# Altium PCB 核心板PCB.PcbDoc
Units mil, origin at the board's own origin, x right, y up, seen from the top; angles counter-clockwise.
Board outline 1430.31 x 1010.17 mil, 2 copper layers (Top Layer, Bottom Layer); 26 components, 57 nets, 168 pads, 30 vias.
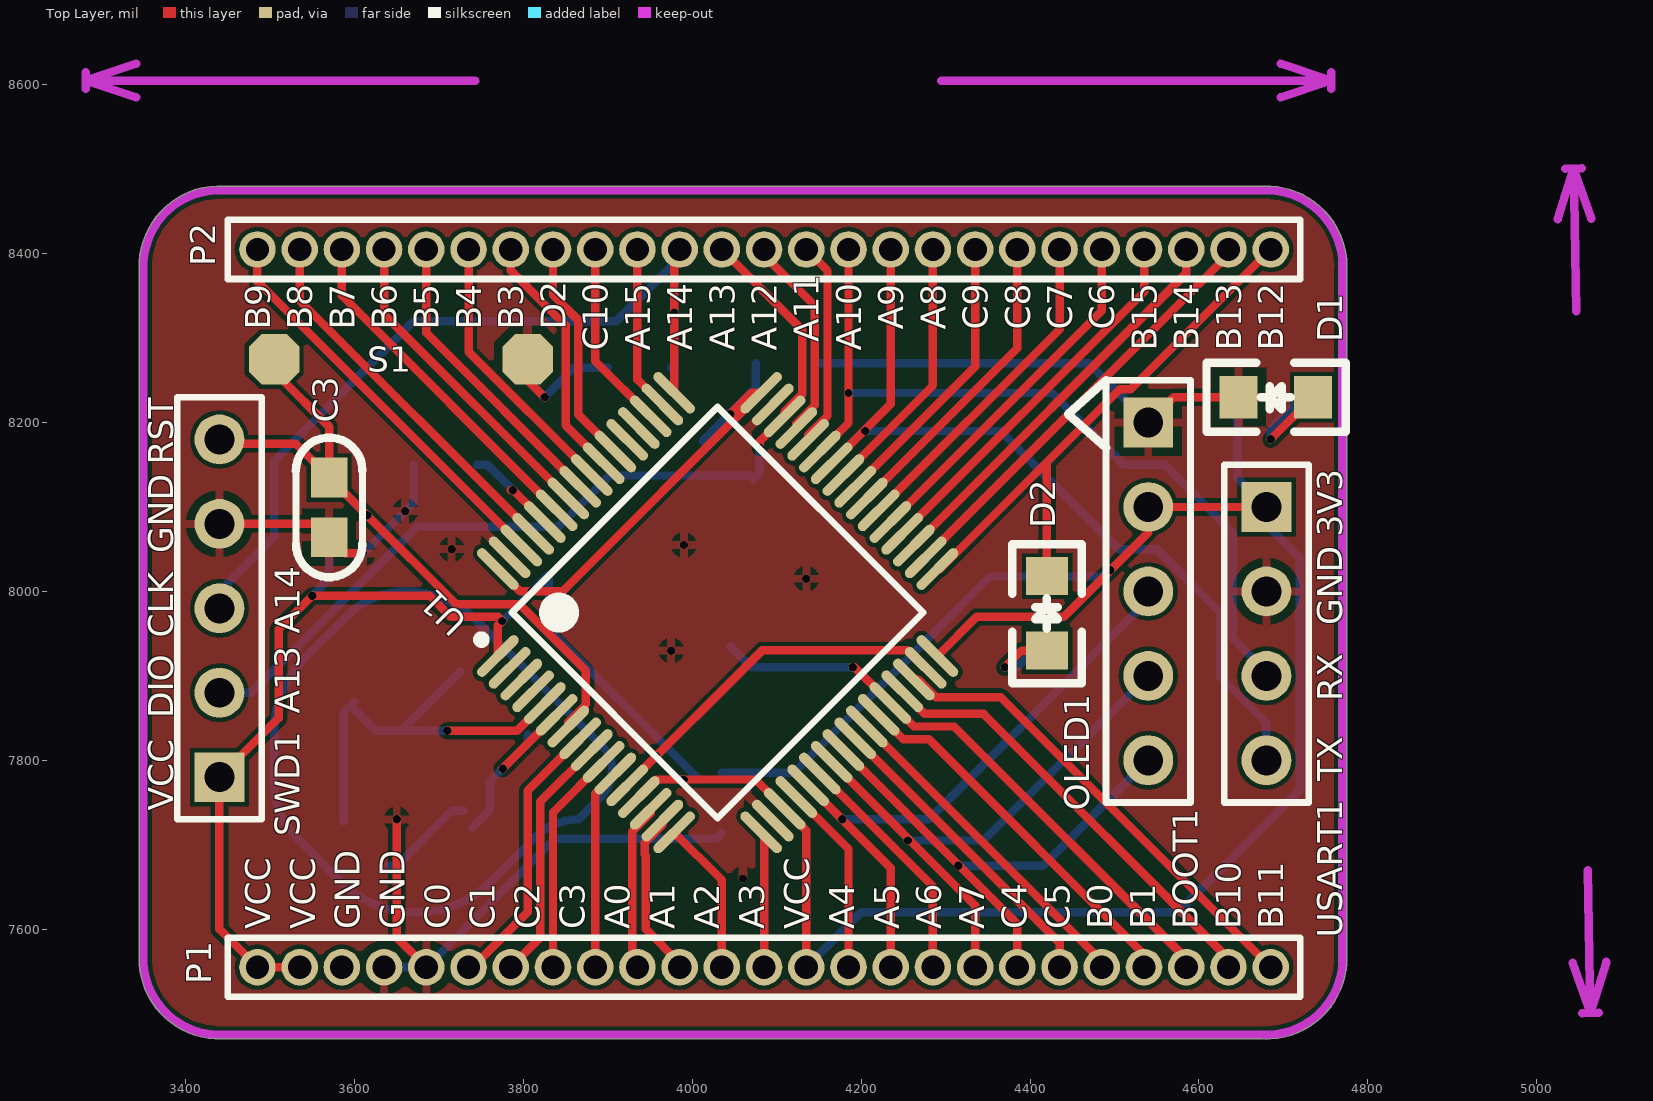
[diagram p0: Top Layer view]
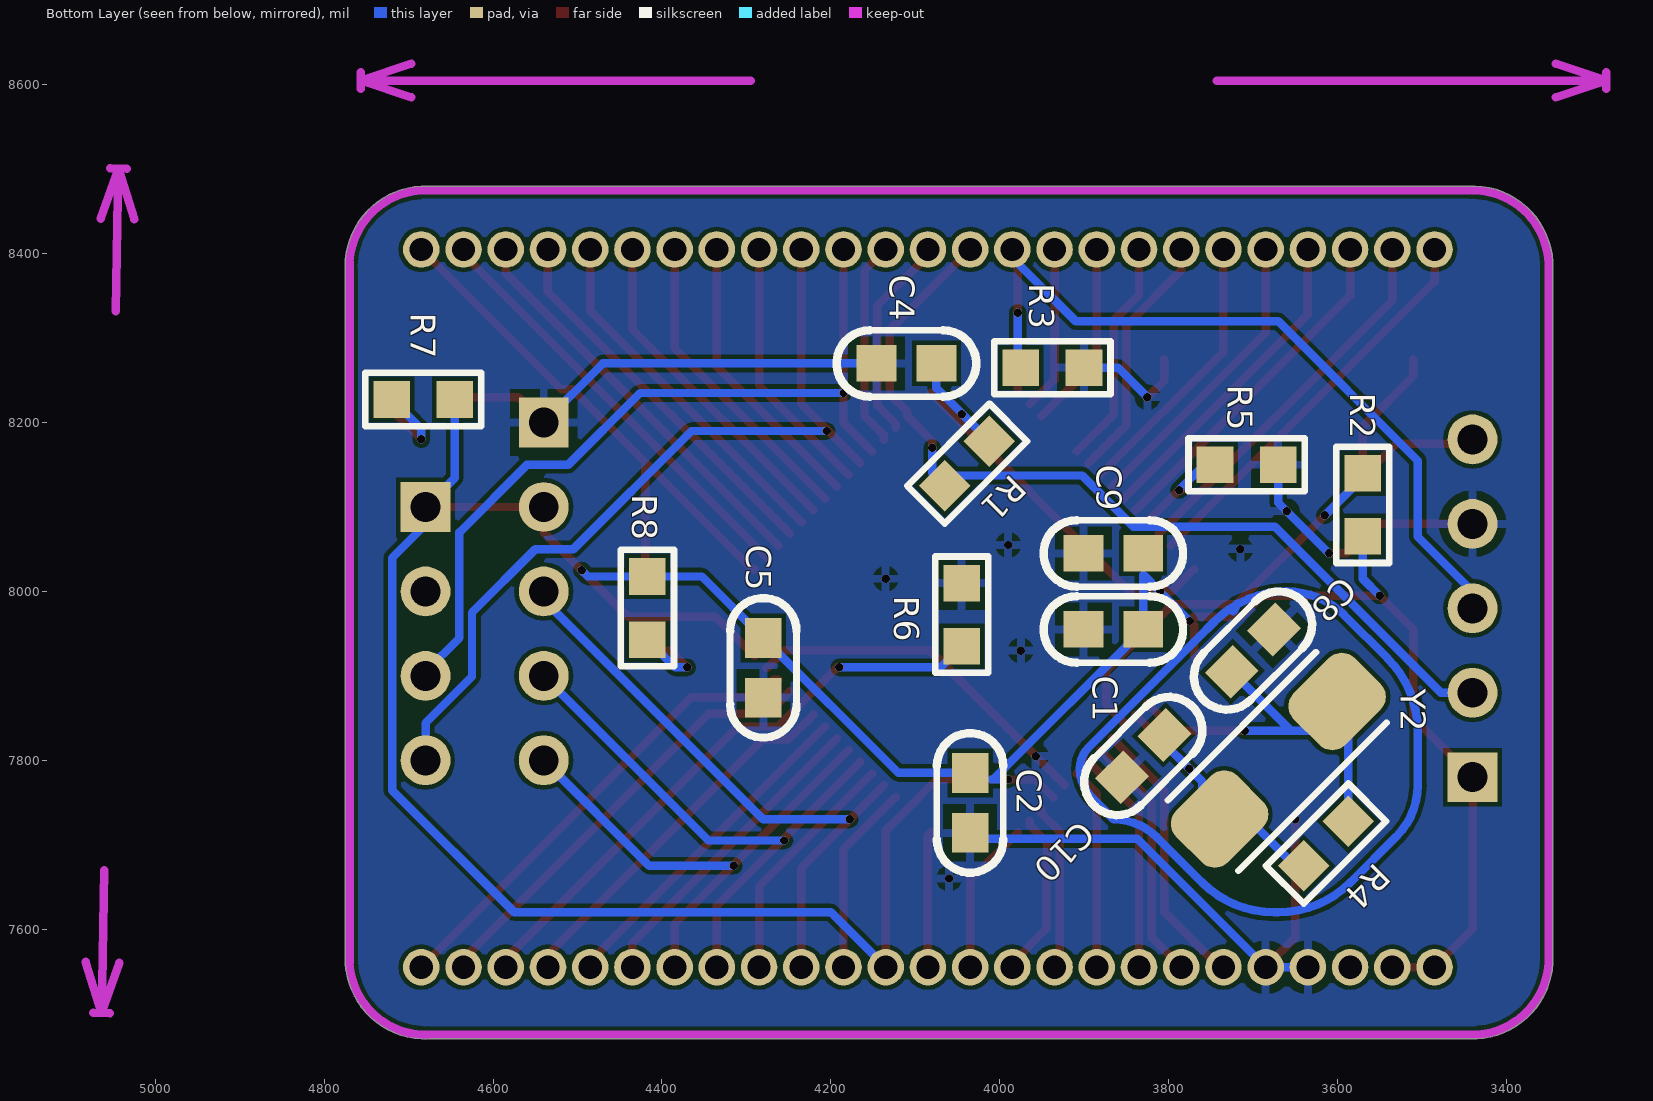
[diagram p1: Bottom Layer view, seen from below]

## Layer stack, top to bottom
Top Layer: signal copper 1.4
Dielectric: dielectric 12.6, FR-4, Dk 4.8
Bottom Layer: signal copper 1.4

## Board outline
3434.72,7469.99 cw(c3440,7565) 3344.99,7559.72 cw(c3440,7565) 3344.99,7570.14 3344.99,8390 cw(c3350,8390) 3344.99,8390.28 cw(c3440,8385) 3445.14,8480.01 4685,8480.01 cw(c4685,8475) 4685.28,8480.01 cw(c4680,8385) 4775.15,8385 cw(c4680,8385) 4775.02,8379.86 4775.02,7560 cw(c4770,7560) 4775.01,7559.72 cw(c4680,7565) 4685.28,7469.99 cw(c4680,7565) 4674.86,7469.98 3435,7469.98 cw(c3435,7475)

## Design rules (kind name [scope] priority, off if disabled: settings)
Clearance [All] p1: gap=5
PolygonConnect [All] p1: connectstyle=Relief reliefconductorwidth=10 reliefentries=4 polygonreliefangle="90 Angle" airgapwidth=10
RoutingVias [All] p1: holewidth=28 width=50 viastyle="Through Hole" minholewidth=28 minwidth=50 maxholewidth=28 maxwidth=50
SolderMaskExpansion [All] p1: expansion=4
Width [All] p1: maxlimit=10 minlimit=10 preferedwidth=10
28 further rules are at their usual default settings.

## Components (designator, comment, footprint, x,y, rotation, side; value= is the part's Value field where it differs from the comment)
C1 "Cap" CAP-MLCC-0603#1 3830,7955 r0 bottom
C2 "Cap" CAP-MLCC-0603#1 4035,7785 r270 bottom
C3 "Cap" CAP-MLCC-0603#2 3570,8135 r90 top
C4 "Cap" CAP-MLCC-0603#1 4075,8270 r0 bottom
C5 "Cap" CAP-MLCC-0603#1 4280,7945 r270 bottom
C8 "Cap" CAP-MLCC-0603#1 3675,7955 r315 bottom
C9 "Cap" CAP-MLCC-0603#1 3830,8045 r0 bottom
C10 "Cap" CAP-MLCC-0603#1 3855,7780 r135 bottom
D1 "lED" 0805D 4735,8230 r180 top
D2 "lED" 0805D 4420,7930 r90 top
OLED1 "Header 5" HDR1X5 4540,8200 r270 top
P1 "Comment" HDR1X25_1.27 3485,7605 r0 top
P2 "Comment" HDR1X25_1.27 3485,8455 r0 top
R1 "Res1" RES-0603#1 4065,8125 r135 bottom
R2 "Res1" RES-0603#2 3570,8140 r90 bottom
R3 "Res1" RES-0603#1 3975,8265 r180 bottom
R4 "Res1" RES-0603#1 3640,7675 r135 bottom
R5 "Res1" RES-0603#1 3745,8150 r180 bottom
R6 "Res1" RES-0603#1 4045,7935 r90 bottom
R7 "Res1" RES-0603#1 4720.11,8227.31 r180 bottom
R8 "Res1" RES-0603#1 4417.31,7942.89 r90 bottom
S1 "SW-PB" "key - duplicate" 3625,8275 r0 top
SWD1 "Header 5" HDR1X5 3440,7780 r90 top
U1 "stm32F103RCT6" STM32F103RCT6 4030,7975 r45 top
USART1 "Header 4" HDR1X4 4680,8100 r270 top
Y2 "8M" Osc-6032 3670,7800 r135 bottom

## Footprints (in the part's own frame and the unit in brackets; to place one, negate y for a bottom-side part, rotate by r counter-clockwise, add the part's x,y. Pads: shape width x height; smd on the part's side, far side on the other; paste and mask are expansions set on the pad)
0805D [mil]
  rect 45x50 smd: A(0,0) K(88,0)
  silkscreen extent -39,-41 126,41
CAP-MLCC-0603#1 [mm]
  rect 1.2x1.1 smd: 1(0,0) 2(1.8,0)
  silkscreen extent -1.2,-1 3,1, body extent 0.02,-0.48 1.77,0.47, height 0.85
CAP-MLCC-0603#2 [mm]
  rect 1.2x1.1 smd: 1(0,0) 2(-1.8,0)
  silkscreen extent -3,-1 1.2,1, body extent -1.77,-0.47 -0.02,0.48, height 0.85
HDR1X4 [mm] "Connector; Header; 4 Position"
  rect 1.5x1.5 hole 0.9: 1(0,0)
  round 1.5 hole 0.9: 2(2.54,0) 3(5.08,0) 4(7.62,0)
  silkscreen extent -1.27,-1.27 8.89,1.27
HDR1X5 [mm] "Connector; Header; 5 Position"
  rect 1.5x1.5 hole 0.9: 1(0,0)
  round 1.5 hole 0.9: 2(2.54,0) 3(5.08,0) 4(7.62,0) 5(10.16,0)
  silkscreen extent -1.27,-1.27 11.43,1.27
HDR1X25_1.27 [mm]
  round 1.1 hole 0.7: 1(0,-1.27) 2(1.27,-1.27) 3(2.54,-1.27) 4(3.81,-1.27) 5(5.08,-1.27) 6(6.35,-1.27) 7(7.62,-1.27) 8(8.89,-1.27) 9(10.16,-1.27) 10(11.43,-1.27) 11(12.7,-1.27) 12(13.97,-1.27) 13(15.24,-1.27) 14(16.51,-1.27) 15(17.78,-1.27) 16(19.05,-1.27) 17(20.32,-1.27) 18(21.59,-1.27) 19(22.86,-1.27) 20(24.13,-1.27) 21(25.4,-1.27) 22(26.67,-1.27) 23(27.94,-1.27) 24(29.21,-1.27) 25(30.48,-1.27)
  silkscreen extent -0.89,-2.16 31.37,-0.38
"key - duplicate" [mil]
  oct 60x60 smd: 1(-120,0) 2(180,0)
Osc-6032 [mm]
  rrect50% 2.6x2.2 smd: 1(-2.5,0) 2(2.5,0)
  silkscreen extent -3.2,-1.5 3.1,1.5
RES-0603#1 [mm]
  rect 1.1x1.1 smd: 1(0,0) 2(1.9,0)
  silkscreen extent -0.8,-0.8 2.7,0.8, body extent 0.1,-0.48 1.8,0.47, height 0.6
RES-0603#2 [mm]
  rect 1.1x1.1 smd: 1(0,0) 2(-1.9,0)
  silkscreen extent -2.7,-0.8 0.8,0.8, body extent -1.8,-0.47 -0.1,0.48, height 0.6
STM32F103RCT6 [mm]
  oval 1.65x0.3 smd: 1(-5.6,3.75) 2(-5.6,3.25) 3(-5.6,2.75) 4(-5.6,2.25) 5(-5.6,1.75) 6(-5.6,1.25) 7(-5.6,0.75) 8(-5.6,0.25) 9(-5.6,-0.25) 10(-5.6,-0.75) 11(-5.6,-1.25) 12(-5.6,-1.75) 13(-5.6,-2.25) 14(-5.6,-2.75) 15(-5.6,-3.25) 16(-5.6,-3.75) 33(5.6,-3.75) 34(5.6,-3.25) 35(5.6,-2.75) 36(5.6,-2.25) 37(5.6,-1.75) 38(5.6,-1.25) 39(5.6,-0.75) 40(5.6,-0.25) 41(5.6,0.25) 42(5.6,0.75) 43(5.6,1.25) 44(5.6,1.75) 45(5.6,2.25) 46(5.6,2.75) 47(5.6,3.25) 48(5.6,3.75)
  oval 0.3x1.65 smd: 17(-3.75,-5.6) 18(-3.25,-5.6) 19(-2.75,-5.6) 20(-2.25,-5.6) 21(-1.75,-5.6) 22(-1.25,-5.6) 23(-0.75,-5.6) 24(-0.25,-5.6) 25(0.25,-5.6) 26(0.75,-5.6) 27(1.25,-5.6) 28(1.75,-5.6) 29(2.25,-5.6) 30(2.75,-5.6) 31(3.25,-5.6) 32(3.75,-5.6) 49(3.75,5.6) 50(3.25,5.6) 51(2.75,5.6) 52(2.25,5.6) 53(1.75,5.6) 54(1.25,5.6) 55(0.75,5.6) 56(0.25,5.6) 57(-0.25,5.6) 58(-0.75,5.6) 59(-1.25,5.6) 60(-1.75,5.6) 61(-2.25,5.6) 62(-2.75,5.6) 63(-3.25,5.6) 64(-3.75,5.6)
  silkscreen extent -5.72,-4.37 4.37,4.57, body extent -5,-5 5,5, height 1.6

## Part data
C1 C2 C4 C5 C8 C9 C10: library part Cap_1, "Capacitor"
C3: "Capacitor"
D1 D2: library part 00-D-LED, "LED"
OLED1 SWD1: "Header, 5-Pin"
P1 P2: library part "Header 25", "Header, 25-Pin"
R1 R2 R3 R4 R5 R6 R7 R8: library part Res1_1, "Resistor"
S1: "Switch"
USART1: "Header, 4-Pin"
Y2: library part C-Osc, "Crystal Oscillator"

## Via types
v1: diameter 10, hole 10, Top Layer to Bottom Layer, 30 vias

## Nets (pads, with @x,y where several pads share a name; then routed paths per layer and width w, separated by ;. In a path a pad name is that pad's centre, name@x,y a point inside that pad or via, vN(x,y) a via of type N, cw(c..) or ccw(c..) an arc to the next point about the centre after c; other vN are vias at no path point)
3V3: C1.1 C2.1 C4.1 C5.1 C9.1 OLED1.2 P1.1 P1.2 P1.14 R1.2 R2.2 R7.2 R8.2 SWD1.1 U1.1 U1.13 U1.19 U1.32 U1.48 U1.64 USART1.1 | length 4511.7
  Top Layer w10: P1.2 P1.1 3440,7600 SWD1.1 3510,7850 3510,7955 v1(3550,7995) 3688.79,7995 3713.79,7970 3770,7970 v1(3775,7965) 3769.71,7959.71 U1.1 ; U1.64 3796.21,8000 v1(3810,8000) 3846.21,8000 U1.48 4070.29,8235.29 v1(4045,8210) ; U1.13 3957.52,7777.24 v1(3990,7777.24) 4074.64,7777.24 U1.19 4135,7716.89 P1.14 ; U1.32 4336.8,7970 4440,7970 v1(4495,8025) 4540,8070 OLED1.2 USART1.1
  Bottom Layer w10: v1(3550,7995) 3570,8015 R2.2 ; v1(3775,7965) v1(3810,8000) 3830,8020 C1.1 4007.76,7777.24 ; v1(3990,7777.24) 4007.76,7777.24 ; 4010,7777.24 4007.76,7777.24 ; R1.2 4075,8240.79 C4.1 ; C2.1 4120,7785 C5.1 4352.69,8017.69 R8.2 4487.69,8017.69 v1(4495,8025) ; P1.14 4200,7620 4575,7620 4719.53,7764.53 4719.53,8039.53 4680,8079.06 USART1.1 4645.31,8134.69 R7.2
BOOT0: R5.1 U1.60 | length 111
  Top Layer w10: v1@3785,8120 v1(3787.56,8120) U1.60
  Bottom Layer w10: R5.1 3757.56,8150 v1(3787.56,8120)
BOOT1: P1.23 R6.1 U1.28 | length 703.3
  Top Layer w10: v1(4190,7910) 4192.44,7910 U1.28 4262.44,7840 4310,7840 4585,7565 P1.23
  Bottom Layer w10: R6.1 4070,7910 v1(4190,7910)
GND: C1.2 C2.2 C3.2 C4.2 C5.2 C8.1 C9.2 C10.1 D1.K OLED1.1 P1.4 P1.5 R3.2 R5.2 R6.2 S1.2 SWD1.4 U1.12 U1.18 U1.31 U1.47 U1.63 USART1.2 | length 2083.8
  Top Layer w10: SWD1.4 3554.13,8080 C3.2 3589.13,8045 v1(3610,8045) ; v1(3650,7730) 3650,7590 P1.5 ; S1.2 3805,8250 v1(3825,8230) ; U1.12 4082.79,7930.36 4254.32,7930.36 4275.09,7909.58 U1.31 ; OLED1.1 4570,8230 D1.K
  Bottom Layer w10: v1(3610,8045) 3670.2,8105.2 R5.2 ; P1.4 P1.5 3836.86,7706.86 4027.73,7706.86 C2.2 ; v1(3825,8230) 3860,8265 R3.2 ; C4.2 4470,8270 OLED1.1
  other v1: 4060,7660 3957.44,7805 3975,7930 4135,8015 3715,8050 3990,8055 3660,8095
NetD1_A: D1.A R7.1 | length 132.6
  Top Layer w10: v1(4685,8180) D1.A
  Bottom Layer w10: v1(4685,8180) 4685,8192.2 R7.1
NetD2_A: D2.A R8.1 | length 119.2
  Top Layer w10: v1(4370,7910) 4390,7930 D2.A
  Bottom Layer w10: v1(4370,7910) 4384.42,7910 R8.1
NRST: C3.1 R2.1 S1.1 SWD1.5 U1.7 | length 848.5
  Top Layer w10: SWD1.5@3445,8175 3530,8175 C3.1 ; S1.1@3510,8275 3510,8255 3570,8195 C3.1 ; U1.7 3853.22,7845.33 3874,7866.1 3874,7906 3795,7985 3720,7985 v1(3615,8090) C3.1
  Bottom Layer w10: R2.1 3570,8135 v1(3615,8090)
OLEDRESET: OLED1.5 P1.19 U1.24 | length 619.3
  Top Layer w10: U1.24 4385,7606.08 P1.19
  Bottom Layer w10: v1(4315,7675) 4415,7675 OLED1.5
OSC32_IN: U1.3
OSC32_OUT: U1.4
OSCIN: C8.2 R4.2 U1.5 Y2.2 | length 494.8
  Top Layer w10: v1(3710,7835) 3792.56,7835 U1.5
  Bottom Layer w10: R4.2 3587.11,7856.3 Y2.2 ; Y2.2@3600.4,7859.6 3625,7835 3655.22,7835 ; v1(3710,7835) 3655.22,7835 ; C8.2 3655.22,7835
OSCOUT: C10.2 R4.1 U1.6 Y2.1 | length 344.2
  Top Layer w10: v1@3775,7790 v1(3775.4,7790) U1.6
  Bottom Layer w10: R4.1 3650,7675 3715.4,7740.4 Y2.1@3729.6,7740.4 ; Y2.1@3739.6,7720.4 3760,7740.81 3760,7774.6 v1(3775.4,7790) 3804.89,7819.49 C10.2
PA0: P1.10 U1.14 | length 199.2
  Top Layer w10: P1.10 3928.8,7561.2 3928.8,7715.34 3950.66,7737.2 U1.14
PA1: P1.11 U1.15 | length 199.3
  Top Layer w10: U1.15 3964.58,7723.28 3943.8,7702.5 3943.8,7688.13 3945,7686.93 3945,7600 3985,7560 P1.11
PA2: P1.12 U1.16 | length 183.1
  Top Layer w10: U1.16 4035,7658.2 P1.12
PA3: P1.13 U1.17 | length 161.2
  Top Layer w10: U1.17 4085,7711.21 P1.13
PA4: P1.15 U1.20 | length 227
  Top Layer w10: U1.20 4185,7694.73 P1.15
PA5: OLED1.3 P1.16 U1.21 | length 736
  Top Layer w10: U1.21 v1(4177.56,7730) 4235,7672.56 P1.16
  Bottom Layer w10: v1(4177.56,7730) 4280,7730 4540,7990 OLED1.3
PA6: P1.17 U1.22 | length 284.8
  Top Layer w10: U1.22 4285,7650.4 P1.17
PA7: OLED1.4 P1.18 U1.23 | length 679.4
  Top Layer w10: U1.23 4335,7628.24 P1.18
  Bottom Layer w10: v1(4255,7705) 4345,7705 OLED1.4
PA8: P2.17 U1.41 | length 311.1
  Top Layer w10: U1.41 4285,8243.92 P2.17
PA9: P2.16 U1.42 USART1.4 | length 989
  Top Layer w10: U1.42 4235,8221.76 P2.16
  Bottom Layer w10: v1(4205,8190) 4365,8190 4505,8050 4550,8050 4625,7975 4625,7899.1 4680,7844.1 USART1.4
PA10: P2.15 U1.43 USART1.3 | length 963.3
  Top Layer w10: U1.43 4185,8199.6 v1(4185,8235) P2.15
  Bottom Layer w10: v1(4185,8235) 4425.94,8235 4510.94,8150 4560,8150 4640,8070 4640,7945 4680,7905 USART1.3
PA11: P2.14 U1.44 | length 245.3
  Top Layer w10: P2.14 4160.12,8379.88 4160.12,8207.9 4137.18,8184.96 U1.44
PA12: P2.13 U1.45 | length 245.4
  Top Layer w10: P2.13 4085,8398.07 4145.12,8337.95 4145.12,8220.74 4123.26,8198.88 U1.45
PA13: P2.12 R1.1 SWD1.2 U1.46 | length 1076.8
  Top Layer w10: P2.12 4130.12,8309.88 4130.12,8233.58 4109.34,8212.8 U1.46 4080,8178.11 v1(4080,8170)
  Bottom Layer w10: SWD1.2 3477.43,7880 3674.08,8076.65 3841.65,8076.65 3902.27,8137.27 4067.73,8137.27 4072.5,8132.5 4080,8140 v1(4080,8170)
PA14: P2.11 R3.1 SWD1.3 U1.49 | length 1030.2
  Top Layer w10: U1.49 v1(3978.5,8330) 3978.5,8398.5 P2.11
  Bottom Layer w10: SWD1.3 3440,8000 3505,8065 3505,8155 3670,8320 3910,8320 3985,8395 P2.11 ; R3.1 3978.5,8268.5 v1(3978.5,8330)
PA15: P2.10 U1.50 | length 195.9
  Top Layer w10: P2.10 3935,8250.95 U1.50
PB0: P1.21 U1.26 | length 400.2
  Top Layer w10: U1.26 4485,7561.76 P1.21
PB1: P1.22 U1.27 | length 446.9
  Top Layer w10: U1.27 4249.6,7825 4280,7825 4535,7570 P1.22
PB3: P2.7 U1.55 | length 298.8
  Top Layer w10: P2.7 3785,8380 3850,8315 3850,8196.76 U1.55
PB4: P2.6 U1.56 | length 327.6
  Top Layer w10: P2.6 3735,8283.92 U1.56
PB5: P2.5 U1.57 | length 356.5
  Top Layer w10: P2.5 3685,8306.08 U1.57
PB6: P2.4 U1.58 | length 385.4
  Top Layer w10: P2.4 3635,8328.24 U1.58
PB7: P2.3 U1.59 | length 414.2
  Top Layer w10: P2.3 3585,8350.4 U1.59
PB8: P2.2 U1.61 | length 451.3
  Top Layer w10: P2.2 3535,8344.73 U1.61
PB9: P2.1 U1.62 | length 480.1
  Top Layer w10: P2.1 3485,8366.89 U1.62
PB10: P1.24 U1.29 | length 527.7
  Top Layer w10: U1.29 4275.27,7855 4345,7855 4635,7565 P1.24
PB11: P1.25 U1.30 | length 563.7
  Top Layer w10: U1.30 4267.8,7895.66 4288.58,7874.88 4365.12,7874.88 P1.25
PB12: D2.K P2.25 U1.33 | length 686.7
  Top Layer w10: U1.33 4293.3,8026.5 4420,8153.2 ; D2.K 4420,8153.2 ; P2.25 4519.53,8239.53 4506.33,8239.53 4420,8153.2
PB13: P2.24 U1.34 | length 513.1
  Top Layer w10: U1.34 4635,8399.05 P2.24
PB14: P2.23 U1.35 | length 484.3
  Top Layer w10: U1.35 4585,8376.89 P2.23
PB15: P2.22 U1.36 | length 455.4
  Top Layer w10: U1.36 4535,8354.73 P2.22
PC0: P1.6 U1.8 | length 328.7
  Top Layer w10: P1.6 3740,7555 3805,7620 3805,7763.92 U1.8
PC1: P1.7 U1.9 | length 296.9
  Top Layer w10: P1.7 3820,7590 3820,7751.08 U1.9
PC2: P1.8 U1.10 | length 268.1
  Top Layer w10: P1.8 3835,7738.24 U1.10
PC3: P1.9 U1.11 | length 239.2
  Top Layer w10: P1.9 3885,7760.4 U1.11
PC5: P1.20 U1.25 | length 371.4
  Top Layer w10: U1.25 4435,7583.92 P1.20
PC6: P2.21 U1.37 | length 426.5
  Top Layer w10: U1.37 4485,8332.56 P2.21
PC7: P2.20 U1.38 | length 397.7
  Top Layer w10: U1.38 4435,8310.4 P2.20
PC8: P2.19 U1.39 | length 368.8
  Top Layer w10: U1.39 4385,8288.24 P2.19
PC9: P2.18 U1.40 | length 339.9
  Top Layer w10: U1.40 4335,8266.08 P2.18
PC10: P2.9 U1.51 | length 224.7
  Top Layer w10: P2.9 3885,8273.11 U1.51
PC11: U1.52
PC12: U1.53
PC13: U1.2
PD2: P2.8 U1.54 | length 269.9
  Top Layer w10: P2.8 3835,8351.21 3865,8321.21 3865,8209.6 U1.54
pads on no net: P1.3
copper on no net: | length 1229.2
  Bottom Layer w10: 3720,7985 ccw(c3732.07,7985) 3723.54,7976.46 ; 3883.79,7748.79 3892.93,7757.93 ccw(c3875.86,7775) 3900,7775 ; 3505,7770.36 ccw(c3590.36,7770.36) 3530,7710 3584.64,7655.36 ccw(c3670,7740.71) 3670,7620 3675,7620 ccw(c3675,7740.71) 3760.36,7655.36 3813.79,7708.79 cw(c3865,7657.57) 3865,7730 3890.86,7755.86 ccw(c3856.72,7790) 3905,7790 ccw(c3868.79,7790) 3894.39,7815.61 3765,7945 3745.36,7964.64 ccw(c3660,7879.29) 3660,8000 ccw(c3660,7903.43) 3591.72,7971.72 3540.36,7920.36 ccw(c3625.71,7835) 3505,7835 3505,7770.36

## Polygon pours and split planes (outlines as drawn)
GND on Bottom Layer "Bottom Layer-No Net" (solid, remove dead copper, pour order 8): 4849.96,8550.58 3089.96,8550.58 3039.96,8500.58 3129.96,8410.58 3129.96,7350.58 4804.96,7350.58 4859.96,7405.58
GND on Bottom Layer "Bottom Layer-No Net" (solid, remove dead copper, pour order 6): 3525,8000 3535,8010 3735,8010 3735,7990 3935,7790 3915,7770 3915,7605 3495,7605 3470,7630 3505,7665 3505,7955
GND on Top Layer "Bottom Layer-No Net" (solid, remove dead copper, pour order 10): 4881.83,8544.8 4861.83,8524.8 2966.83,8524.8 2966.83,7464.8 3031.83,7399.8 3041.83,7409.8 4856.83,7409.8

## Keep-outs
Keep-Out Layer:
  lines w10: 3281.6,8595 3281.6,8615 ; 3341.6,8585 3281.6,8605 ; 3341.6,8625 3281.6,8605 ; 3350,7560 3350,8390 cw(c3440,8385) 3445,8475 4685,8475 cw(c4680,8385) 4770,8380 4770,7560 cw(c4680,7565) 4675,7475 ; 3350,7570 ccw(c3440,7565) 3435,7475 4685,7475 ; 3743.18,8605 3281.6,8605 ; 4295.01,8605 4756.6,8605 ; 4696.6,8585 4756.6,8605 ; 4696.6,8625 4756.6,8605 ; 4756.6,8595 4756.6,8615 ; 5024.89,8440.45 5043.68,8500.84 ; 5033.69,8500.64 5053.68,8501.04 ; 5042.49,7560.43 5063.68,7500.84 ; 5047.07,8331.67 5043.68,8500.84 ; 5053.69,7500.64 5073.68,7501.04 ; 5060.3,7670.01 5063.68,7500.84 ; 5064.88,8441.25 5043.68,8500.84 ; 5082.48,7561.23 5063.68,7500.84
  text "1475 (mil)" at 3753.18,8569.01 h60
  text "1000.2 (mil)" at 5011.28,8320.95 h60 r271.15

## Silkscreen, mask and mechanical layers (free items; w line width, h text height)
Top Overlay:
  lines w10: 4490,8170 4445,8210 4490,8250
  text "B9" at 3500,8310 h30 r90
  text "B8" at 3550,8310 h30 r90
  text "B7" at 3600,8310 h30 r90
  text "B6" at 3650,8310 h30 r90
  text "B5" at 3700,8310 h30 r90
  text "B4" at 3750,8310 h30 r90
  text "B3" at 3800,8310 h30 r90
  text "D2" at 3850,8310 h30 r90
  text "A9" at 4250,8310 h30 r90
  text "A8" at 4300,8310 h30 r90
  text "C9" at 4350,8310 h30 r90
  text "C8" at 4400,8310 h30 r90
  text "C7" at 4450,8310 h30 r90
  text "C6" at 4500,8310 h30 r90
  text "A11" at 4150,8295 h30 r90
  text "C10" at 3900,8285.01 h30 r90
  text "A15" at 3950,8285.01 h30 r90
  text "A14" at 4000,8285.01 h30 r90
  text "A13" at 4050,8285.01 h30 r90
  text "A12" at 4100,8285.01 h30 r90
  text "A10" at 4200,8285.01 h30 r90
  text "B15" at 4550,8285.01 h30 r90
  text "B14" at 4600,8285.01 h30 r90
  text "B13" at 4650,8285.01 h30 r90
  text "B12" at 4700,8285.01 h30 r90
  text "RST" at 3385,8150 h30 r90
  text "3V3" at 4770,8065 h30 r90
  text "GND" at 3385,8045 h30 r90
  text "GND" at 4770,7960 h30 r90
  text "A14" at 3535,7950 h30 r90
  text "CLK" at 3385,7945 h30 r90
  text "RX" at 4770,7870 h30 r90
  text "A13" at 3535,7855 h30 r90
  text "DIO" at 3385,7850 h30 r90
  text "TX" at 4770,7775 h30 r90
  text "VCC" at 3385,7740 h30 r90
  text "VCC" at 3500,7600 h30 r90
  text "VCC" at 3553.21,7600 h30 r90
  text "GND" at 3606.43,7600 h30 r90
  text "GND" at 3659.64,7600 h30 r90
  text "C0" at 3712.86,7600 h30 r90
  text "C1" at 3766.07,7600 h30 r90
  text "C2" at 3819.29,7600 h30 r90
  text "C3" at 3872.5,7600 h30 r90
  text "A0" at 3925.71,7600 h30 r90
  text "A1" at 3978.93,7600 h30 r90
  text "A2" at 4032.14,7600 h30 r90
  text "A3" at 4085.36,7600 h30 r90
  text "VCC" at 4138.57,7600 h30 r90
  text "A4" at 4191.78,7600 h30 r90
  text "A5" at 4245,7600 h30 r90
  text "A6" at 4295,7600 h30 r90
  text "A7" at 4345.62,7600 h30 r90
  text "C4" at 4396.25,7600 h30 r90
  text "C5" at 4446.88,7600 h30 r90
  text "B0" at 4497.5,7600 h30 r90
  text "B1" at 4548.12,7600 h30 r90
  text "BOOT1" at 4598.75,7600 h30 r90
  text "B10" at 4649.38,7600 h30 r90
  text "B11" at 4700,7600 h30 r90